# Altium PCB Digital Sensor Module.PcbDoc
Units mil, origin at the board's own origin, x right, y up, seen from the top; angles counter-clockwise.
Board outline 3750 x 900 mil, 2 copper layers (Top Layer, Bottom Layer); 62 components, 57 nets, 230 pads, 52 vias.
Unrouted connection lines stored in the file: 125.
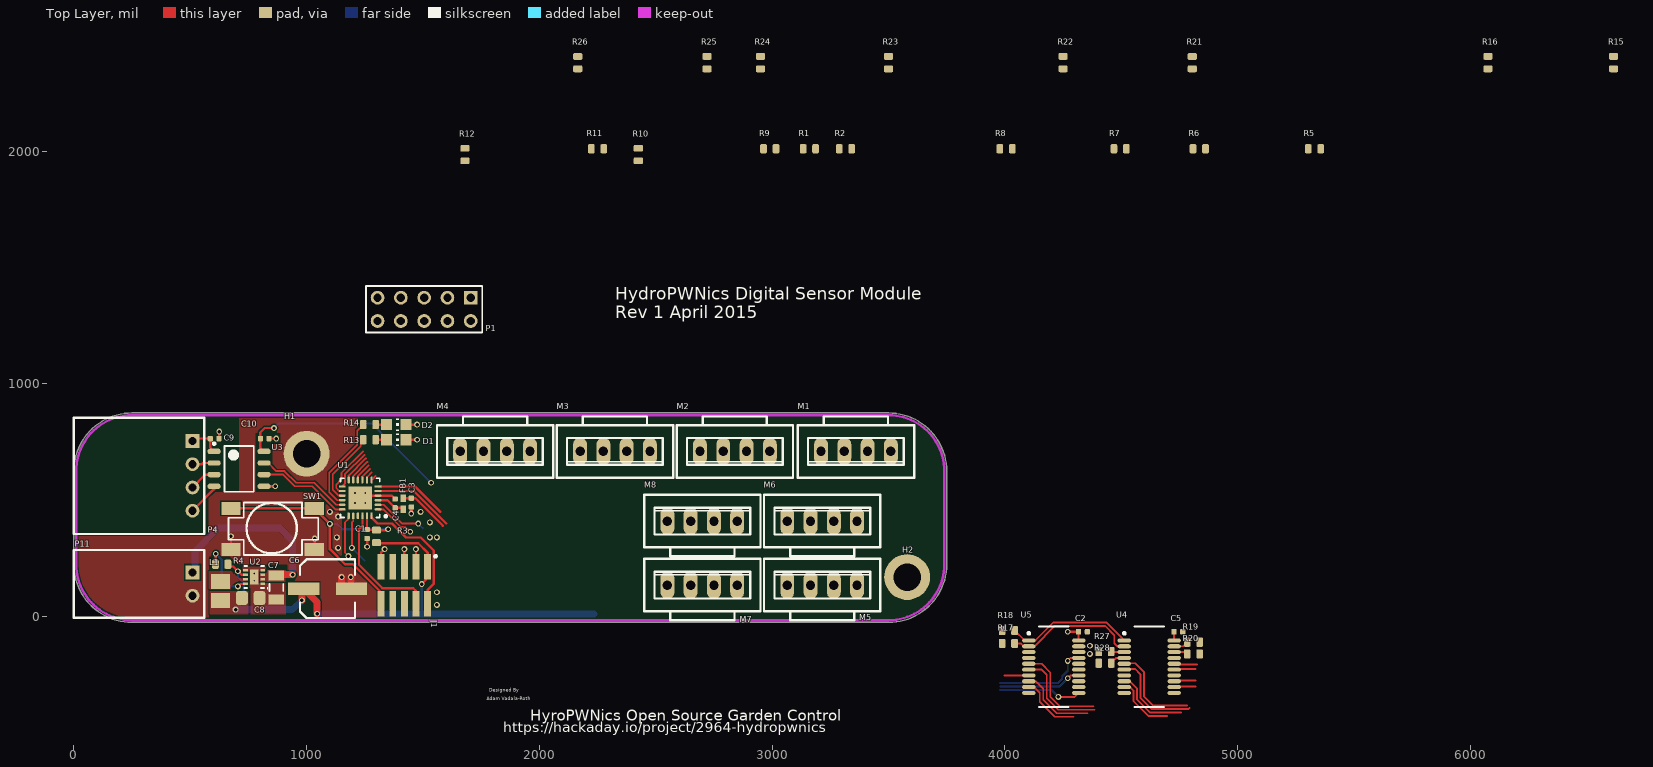
[diagram p0: Top Layer view]
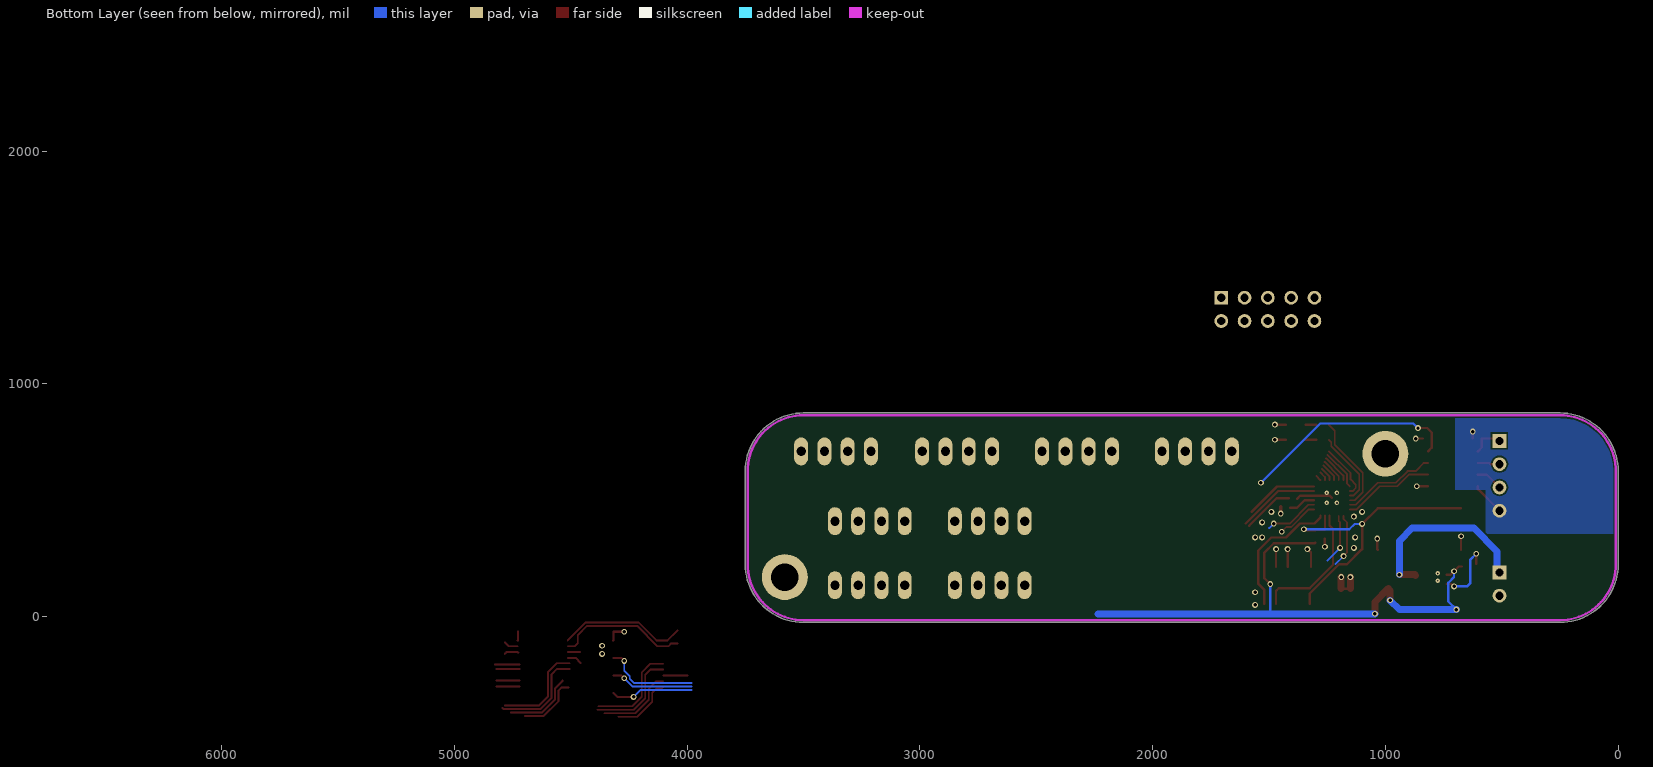
[diagram p1: Bottom Layer view, seen from below]

## Layer stack, top to bottom
Top Solder: solder mask 0.4, Solder Resist, Dk 3.5
Top Layer: signal copper 1.4
Dielectric 1: dielectric 12.6, FR-4, Dk 4.8
Bottom Layer: signal copper 1.4
Bottom Solder: solder mask 0.4, Solder Resist, Dk 3.5

## Board outline
0,225 0,625 cw(c250,625) 250,875 3500,875 cw(c3500,625) 3750,625 3750,225 cw(c3500,225) 3500,-25 250,-25 cw(c250,225)

## Design rules (kind name [scope] priority, off if disabled: settings)
Clearance [All] p1: gap=7
PlaneConnect [All] p1: planeconnectstyle=Direct reliefexpansion=20 reliefentries=4 reliefconductorwidth=10 reliefairgap=10
PolygonConnect [All] p1: connectstyle=Direct reliefconductorwidth=10 reliefentries=4 polygonreliefangle="90 Angle" airgapwidth=10
RoutingVias [All] p1: holewidth=28 width=50 viastyle="Through Hole" minholewidth=28 minwidth=50 maxholewidth=28 maxwidth=50
SolderMaskExpansion [All] p1: expansion=4
Width [All] p1: maxlimit=100 minlimit=7 preferedwidth=8
29 further rules are at their usual default settings.

## Components (designator, comment, footprint, x,y, rotation, side; value= is the part's Value field where it differs from the comment)
C1 "100nF" C0402 1260,355 r270 top
C2 "100nF" C0402 4335,-65 r0 top
C3 "100nF" C0402 1450,490 r270 top
C4 "100nF" C0402 1380,486.38 r90 top
C5 "100nF" C0402 4745,-65 r0 top
C6 "EEE-1VA101XP" EEE-1VA101XP 1090,120 r180 top
C7 "10uF 50V" C1206 870,125 r270 top
C8 "0603" C0805 760,80 r180 top
C9 "100nF" C0402 605,765 r0 top
C10 "100nF" C0402 820,765 r0 top
D1 "5988140107F" LED2012120 1385,760 r0 top
D2 "5988140107F" LED2012120 1385,825 r0 top
FB1 "BLM15HG601SN1D" BLM18PG121SN1D 1415,485 r270 top
H1 "M3 Hole" Hole-3mm#1 1025,720 r0 top
H2 "M3 Hole" Hole-3mm#2 3575,150 r0 top
J1 "FTSH-105-XX-X-DV" FTSH-105-XX-X-DV 1420,135 r0 top
L1 "VLS252012T-2R2M1R3" VLS252012T-2R2M1R3 630,110 r270 top
M1 "Molex 0705430003" 4POL254 3360,710 r180 top
M2 "Molex 0705430003" 4POL254 2840,710 r180 top
M3 "Molex 0705430003" 4POL254 2325,710 r180 top
M4 "Molex 0705430003" 4POL254 1810,710 r180 top
M5 "Molex 0705430003" 4POL254 3215,135 r0 top
M6 "Molex 0705430003" 4POL254 3215,410 r0 top
M7 "Molex 0705430003" 4POL254 2700,135 r0 top
M8 "Molex 0705430003" 4POL254 2700,410 r0 top
P1 "Header 5X2" HDR2X5 1705,1370 r180 top
P4 "Molex 0705530003" 0705530003 510,755 r270 top
P11 "Molex 0705530001" 0705530001 510,190 r270 top
R1 "4.7K" R0603 3160,2010 r0 top
R2 "4.7K" R0603 3315,2010 r0 top
R3 "1K" R0603 1300,345 r270 top
R4 "100K" R0603 635,225 r0 top
R5 "4.7K" R0603 5330,2010 r0 top
R6 "4.7K" R0603 4835,2010 r0 top
R7 "4.7K" R0603 4495,2010 r0 top
R8 "4.7K" R0603 4005,2010 r0 top
R9 "4.7K" R0603 2990,2010 r0 top
R10 "4.7K" R0603 2425,1985 r90 top
R11 "4.7K" R0603 2250,2010 r0 top
R12 "4.7K" R0603 1680,1985 r90 top
R13 "1K" R0603 1270,760 r0 top
R14 "1K" R0603 1270,825 r0 top
R15 "4.7K" R0603 6615,2380 r90 top
R16 "4.7K" R0603 6075,2380 r90 top
R17 "4.7K" R0603 4015,-115 r0 top
R18 "4.7K" R0603 4015,-60 r0 top
R19 "4.7K" R0603 4810,-110 r180 top
R20 "4.7K" R0603 4810,-160 r180 top
R21 "4.7K" R0603 4805,2380 r90 top
R22 "4.7K" R0603 4250,2380 r90 top
R23 "4.7K" R0603 3500,2380 r90 top
R24 "4.7K" R0603 2950,2380 r90 top
R25 "4.7K" R0603 2720,2380 r90 top
R26 "4.7K" R0603 2165,2380 r90 top
R27 "4.7K" R0603 4430,-150 r0 top
R28 "4.7K" R0603 4430,-200 r0 top
SW1 "TL3301AF160QG" TL3301AF160QG 675,465 r0 top
U1 "MKL05Z16VFK4 - VQFN24" 98ASA00474D 1230,510 r180 top
U2 "TPS62162DSG" DSG8-1600X900TP 775,170 r180 top
U3 "ADUM3210BRZ-RL7" ADUM3210BRZ-RL7 710,635 r0 top
U4 "PCA9518DWR" PCA9518DWR 4620,-215 r0 top
U5 "PCA9518DWR" PCA9518DWR 4210,-215 r0 top

## Footprints (in the part's own frame and the unit in brackets; to place one, negate y for a bottom-side part, rotate by r counter-clockwise, add the part's x,y. Pads: shape width x height; smd on the part's side, far side on the other; paste and mask are expansions set on the pad)
4POL254 [mil]
  oval 60x120 hole 40: 1(-150,0) 2(-50,0) 3(50,0) 4(150,0)
  silkscreen extent -250,-150 250,113, body extent -250,-150 250,113, height 454
98ASA00474D [mm] "QFN, 24-Leads, Body 3.98x3.98mm, Pitch 0.50mm, Thermal Pad 2.80x2.80mm, IPC Medium Density"
  oval 0.75x0.25 smd: 1(-1.95,1.25) 2(-1.95,0.75) 3(-1.95,0.25) 4(-1.95,-0.25) 5(-1.95,-0.75) 6(-1.95,-1.25) 13(1.95,-1.25) 14(1.95,-0.75) 15(1.95,-0.25) 16(1.95,0.25) 17(1.95,0.75) 18(1.95,1.25)
  oval 0.25x0.75 smd: 7(-1.25,-1.95) 8(-0.75,-1.95) 9(-0.25,-1.95) 10(0.25,-1.95) 11(0.75,-1.95) 12(1.25,-1.95) 19(1.25,1.95) 20(0.75,1.95) 21(0.25,1.95) 22(-0.25,1.95) 23(-0.75,1.95) 24(-1.25,1.95)
  rect 2.54x2.54 smd: 25(0,0)
  silkscreen extent -2.93,-2.15 2.15,2.15, body extent -2,-2 2,2, height 1
0705530001 [mm]
  rect 1.5x1.5 hole 0.9: 1(0,0)
  round 1.5 hole 0.9: 2(2.54,0)
  silkscreen extent -2.44,-12.95 4.95,1.27, body extent -2.41,-12.88 4.95,0.71, height 6.96
0705530003 [mm] "Molex 2.54mm 0705530003"
  rect 1.5x1.5 hole 0.9: 1(0,0)
  round 1.5 hole 0.9: 2(2.54,0) 3(5.08,0) 4(7.62,0)
  silkscreen extent -2.54,-12.95 10.16,1.27, body extent -2.54,-13.08 10.16,0.51, height 3.02
ADUM3210BRZ-RL7 [mm] "SOIC, 8-Leads, Body 4.90x3.90mm, Pitch 1.27mm, IPC Medium Density"
  oval 1.45x0.6 smd: 1(-2.725,1.905) 2(-2.725,0.635) 3(-2.725,-0.635) 4(-2.725,-1.905) 5(2.725,-1.905) 6(2.725,-0.635) 7(2.725,0.635) 8(2.725,1.905)
  silkscreen extent -2.85,-2.5 1.6,2.88, body extent -2,-2.5 2,2.5, height 1.75
BLM18PG121SN1D [mm] "Chip Inductor, 2-Leads, Body 1.0x0.5mm, IPC Medium Density"
  rect 0.8x0.6 smd: 1(-0.6,0) 2(0.6,0)
  body extent -0.52,-0.28 0.53,0.27, height 0.6
C0402 [mil]
  rrect40% 22x24 smd: 1(-18.7,0) 2(19,0)
  body extent -20,-10 20,10, height 20
C0805 [mil]
  rrect50% 52x60 smd: 1(-37.4,0) 2(38,0)
  body extent -40,-30 40,30, height 35
C1206 [mm]
  rect 1.1x1.7 smd: 1(-1.325,0) 2(1.325,0)
  silkscreen extent -0.4,-0.75 0.4,0.75, body extent -1.68,-0.87 1.67,0.88, height 1.6
DSG8-1600X900TP [mm] "SON, 8-Leads, Body 2x2mm, Pitch 0.5mm, Thermal Pad 1.6x0.9mm, TI Recommended"
  rect 0.5x0.28 smd paste-0.14 mask+0.07: 1(-0.95,0.75) 2(-0.95,0.25) 3(-0.95,-0.25) 4(-0.95,-0.75) 5(0.95,-0.75) 6(0.95,-0.25) 7(0.95,0.25) 8(0.95,0.75)
  rect 0.9x1.6 smd paste-0.45 mask+0.07: 9(0,0)
  silkscreen extent -1.5,-1.2 1.05,1.25, body extent -1.05,-1.05 1.05,1.05, height 0.8
EEE-1VA101XP [mm] "Panasonic VS D EEE-1VA101XP"
  rect 3.4x1.4 smd: 1(2.6,0) 2(-2.6,0)
  silkscreen extent -3,-3.2 3,3.2, body extent -3.5,-3.3 3.5,3.3, height 5.4
FTSH-105-XX-X-DV [mm] "1.27mm pitch, 10 pin, terminal strip; vertical, SMT"
  rect 0.75x2.8 smd mask+0: 1(2.54,2.03) 2(2.54,-2.03) 3(1.27,2.03) 4(1.27,-2.03) 5(0,2.03) 6(0,-2.03) 7(-1.27,2.03) 8(-1.27,-2.03) 9(-2.54,2.03) 10(-2.54,-2.03)
  silkscreen extent 3.28,3.03 3.52,3.27
HDR2X5 [mm] "Connector; Header; 5x2 Position"
  rect 1.5x1.5 hole 0.9: 1(0,0)
  round 1.5 hole 0.9: 2(0,2.54) 3(2.54,0) 4(2.54,2.54) 5(5.08,0) 6(5.08,2.54) 7(7.62,0) 8(7.62,2.54) 9(10.16,0) 10(10.16,2.54)
  silkscreen extent -1.27,-1.27 11.43,3.81
Hole-3mm#1 [mm]
  round 5 hole 3: 1(-0.635,-0.508)
Hole-3mm#2 [mm]
  round 5 hole 3: 1(0.127,0.508)
LED2012120 [mil]
  rect 48x48 smd: A(-41.34,0) C(42,0)
  silkscreen extent 0,-27 12,27, body extent -50,-25 50,25, height 28
PCA9518DWR [mm] "SOP, 20-Leads, Body 8.65x3.90mm, Pitch 0.64mm, Thermal Pad 5.22x3.10mm, IPC Medium Density"
  oval 1.45x0.45 smd: 1(-2.725,2.857) 2(-2.725,2.222) 3(-2.725,1.587) 4(-2.725,0.953) 5(-2.725,0.318) 6(-2.725,-0.318) 7(-2.725,-0.953) 8(-2.725,-1.587) 9(-2.725,-2.222) 10(-2.725,-2.857) 11(2.725,-2.857) 12(2.725,-2.222) 13(2.725,-1.587) 14(2.725,-0.953) 15(2.725,-0.318) 16(2.725,0.318) 17(2.725,0.953) 18(2.725,1.587) 19(2.725,2.222) 20(2.725,2.857)
  silkscreen extent -2.85,-4.4 1.6,4.4, body extent -2,-4.4 2,4.4, height 1.75
R0603 [mm]
  rrect40% 0.74x1 smd: 1(-0.68,0) 2(0.68,0)
  body extent -0.8,-0.4 0.8,0.4, height 0.8
TL3301AF160QG [mm] "TL3301AF160QG Tactile Switch"
  rect 2.1x1.4 smd: 1(0,0) 1(9.1,0) 2(0,-4.5) 2(9.1,-4.5)
  silkscreen extent -0.25,-5.08 9.53,0.64, body extent -0.43,-5.26 9.57,0.74, height 5.11
VLS252012T-2R2M1R3 [mm] "Precision Wire Wound Inductor, 2-Leads, Body 2.5x2.0mm, IPC Medium Density"
  rect 1.65x2.1 smd: 1(-1.025,0) 2(1.025,0)
  body extent -1.3,-1.05 1.3,1.05, height 1.2

## Part data
C1 C2 C3 C4 C5 C9 C10: library part GRM155R71C104KA88D, "CAP CER 0402 100nF 16V 10% X7R"
C6: "CAP ALUM 100UF 35V 20% SMD"
C7: library part CL31A106KBHNNNE, "CAP CER 10UF 50V 10% X5R 1206"
C8: library part CL21A226KQQNNNE, "CAP CER 22UF 6.3V 10% X5R 0805"
D1 D2: "LED 0805 Yellow"
H1 H2: library part Hole, "3mm Hole"
J1: library part "ARM Cortex JTAG-DEBUG Header"
M1 M2 M3 M4 M5 M6 M7 M8: library part "Molex 0705430003 Alt", "Molex 4 Pin Clip Connector"
P1: "Header, 5-Pin, Dual row"
P4: library part 0705530003, "Molex 0705530003 Right Angle 2.54mm Shrouded Header"
P11: library part 0705530001, "Molex 0705530002 Right Angle 2.54mm Shrouded Header"
R1 R2 R5 R6 R7 R8 R9 R10 R11 R12 R15 R16 R17 R18 R19 R20 R21 R22 R23 R24 R25 R26 R27 R28: library part ERJ3EKF4701V, "RES 0603 4.7K 100mW 1%"
R3 R13 R14: library part ERJ-3EKF1001V, "RES 0603 1K 100mW 1%"
R4: library part RC0603FR-07100KL, "RES 100K OHM 1/10W 1% 0603 SMD"
U1: library part "MKL05Z16VFK4 - 24 Pin VQFN", "ARM Cortex M0+"
U2: library part TPS62162SOP
U3: "DGTL ISO 2.5KV GEN PURP 8SOIC"
U4 U5: "IC EXPANDABLE 5CH I2C HUB 20SOIC"

## Via types
v1: diameter 25, hole 15, Top Layer to Bottom Layer, 46 vias
v2: diameter 19.68, hole 7.87, Top Layer to Bottom Layer, 6 vias

## Nets (pads, with @x,y where several pads share a name; then routed paths per layer and width w, separated by ;. In a path a pad name is that pad's centre, name@x,y a point inside that pad or via, vN(x,y) a via of type N, cw(c..) or ccw(c..) an arc to the next point about the centre after c; other vN are vias at no path point)
3.3VCC: C2.1 C3.1 C5.1 C6.1 C8.2 C10.1 FB1.1 J1.1 L1.2 M1.1 M2.1 M3.1 M4.1 M5.1 M6.1 M7.1 M8.1 P1.2 R1.1 R2.1 R3.2 R4.2 R5.1 R6.1 R7.1 R8.1 R9.1 R10.1 R11.1 R12.1 R15.1 R16.1 R17.1 R18.1 R19.1 R20.1 R21.1 R22.1 R23.1 R24.1 R25.1 R26.1 R27.1 R28.1 U2.6 U3.8 U4.20 U5.20 | length 3745.6
  Top Layer w10: R4.2@671.78,215 685,215 v1(705,195) 720.16,179.84 U2.6 ; U3.8 801.3,725.98 C10.1 801.3,791.3 820,810 v1(860,810) ; R3.2 1303.23,315 1480,315 1520,275 J1.1 1520,165 v1(1495,140) ; FB1.1 C3.1@1449.92,508.62 ; C3.1 1467.26,508.7 1585,390.96 ; v1(4270,-65) C2.1 4316.3,-101.52 U5.20 ; C5.1 4726.3,-101.52 U4.20
  Top Layer w30: v1(980,70) 980,112.36 C6.1 1045,62.64 v1(1045,12)
  Bottom Layer w10: v1(695,30) 730,65 730,145 705,170 v1(705,195) ; v1@857.5,807.5 v1(860,810) 880,830 1280,830 v1(1535,575) ; 1495,12 v1(1495,140)
  Bottom Layer w30: v1(695,30) 940,30 v1(980,70) ; v1(1045,12) 1495,12 2235,12
12VCC: C7.1 P11.1 U2.2 U2.3 | length 790.4
  Top Layer w30: C7.1 872.83,180 v1(940,180)
  Bottom Layer w30: P11.1@520,190 520,280 620,380 885,380 940,325 v1(940,180)
EN1: U1.20 U4.7 U5.7 | length 323.5
  Top Layer w8: v1(1195,295) 1195,405 1200.47,410.47 U1.20 ; 3997.5,-252.5 U5.7
  Bottom Layer w8: v1(1195,295) 1250,240
EN2: U1.19 U4.11 U5.11 | length 592.4
  Top Layer w8: v1(1180,260) 1165,275 1165,405 1180.79,420.79 U1.19 ; v1(4230,-345) 4299.78,-345 U5.11
  Bottom Layer w8: v1(1180,260) 1215,225 ; 3980,-315 4200,-315 v1(4230,-345)
EN3: U1.1 U4.14 U5.14 | length 534.9
  Top Layer w8: U1.1 1329.21,460.79 1405,385 1425,385 v1(1445,365) ; v1(4270,-265) 4282.5,-252.5 U5.14
  Bottom Layer w8: 3980,-300 4235,-300 v1(4270,-265)
EN4: U1.2 U4.17 U5.17 | length 648.2
  Top Layer w8: U1.2 1330.74,480.47 1411.21,400 v1(1480,400) ; v1(4270,-190) 4282.5,-177.5 U5.17
  Bottom Layer w8: v1(1480,400) 1500,380 ; 3980,-285 4228.79,-285 4246.5,-267.29 4246.5,-255.27 4270,-231.77 v1(4270,-190)
EXPSCL1: R18.2 U4.1 U5.1 | length 553.3
  Top Layer w8: R18.2 4084.28,-102.5 U5.1 4131.29,-102.5 4208.79,-25 4436.21,-25 4512.72,-101.5 U4.1
EXPSCL2: R17.2 U4.2 U5.2 | length 569.1
  Top Layer w8: R17.2 4067.44,-115 4079.95,-127.5 U5.2 4127.5,-127.5 4215,-40 4430,-40 4470,-80 4470,-115 4482.5,-127.5 U4.2
EXPSDA1: R20.2 U4.18 U5.18 | length 62.6
  Top Layer w8: U4.18@4724.78,-155 U4.18 4775.72,-152.5 R20.2
  other v1: 4365,-160
EXPSDA2: R19.2 U4.19 U5.19 | length 63.2
  Top Layer w8: U4.19 4765.73,-127.5 R19.2
  other v1: 4365,-125
GND: C1.2 C2.2 C3.2 C4.2 C5.2 C6.2 C7.2 C8.1 C10.2 D1.C D2.C H1.1 H2.1 J1.3 J1.5 J1.9 M1.4 M2.4 M3.4 M4.4 M5.4 M6.4 M7.4 M8.4 P1.1 P11.2 SW1.2 U1.4 U1.25 U2.1 U2.4 U2.5 U2.9 U3.5 U4.10 U5.10 | length 877.6
  Top Layer w10: SW1.2@675,287.83 v1(675,345) ; U3.5 v1(865,560) ; C10.2 v1(870,765) ; SW1.2@1033.27,287.83 1035,289.57 v1(1035,335) ; C6.2@1150,120 C6.2 ; U1.25 1239.84,519.84 U1.4 1365.54,519.84 C4.2 ; v1(1260,300) C1.2 ; J1.9 1320,275 v1(1335,290) ; J1.5 v1(1420,290) ; D1.C v1(1475,760) ; D2.C v1(1475,825) ; J1.3 v1(1470,290)
  Top Layer w15: v1(1450,443.01) C3.2
  Top Layer w30: C6.2@1150,120 v1(1150,170) ; C6.2@1190,120 v1(1190,170)
  other v1: 1560,50 1560,105 1135,295 1130,340 1530,340 1560,340 1530,405 1135,430 1100,450 1490,450
  other v2: 775,154.25 775,185.75 1208.35,488.35 1251.65,488.35 1208.35,531.65 1251.65,531.65
I2C_SCL: R1.2 U1.5 U5.4 | length 351
  Top Layer w10: U1.5 1460.47,539.53 1600,400
I2C_SDA: R2.2 U1.6 U5.3 | length 313.5
  Top Layer w10: U1.6 1465.79,559.21 1575,450
I3.3VCC: C9.1 P4.1 U3.1 | length 142.2
  Top Layer w10: P4.1 520,765 C9.1 586.3,726.42 U3.1
IGND: C9.2 P4.4 U3.4 | length 173.8
  Top Layer w10: P4.4 602.72,547.72 U3.4 ; C9.2 625,766 v1(625,795)
IUART0_RX: P4.3 U3.3 | length 115.5
  Top Layer w10: P4.3 565,610 U3.3
IUART0_TX: P4.2 U3.2 | length 94.8
  Top Layer w10: P4.2 550,655 555,660 U3.2
NetC4_1: C4.1 FB1.2 U1.3 | length 115.4
  Top Layer w10: U1.3 1347.52,500.16 C4.1 FB1.2@1408.7,467.68
NetD1_A: D1.A R13.2 | length 46.9
  Top Layer w10: R13.2 D1.A
NetD2_A: D2.A R14.2 | length 46.9
  Top Layer w10: R14.2 D2.A
NetL1_1: L1.1 U2.7
NetM1_2: M1.2 R5.2 U4.5 | length 414.4
  Top Layer w8: U4.5@4505,-200 4559.78,-200 4597.28,-237.5 4597.28,-342.5 4637.28,-382.5 4782.28,-382.5
NetM1_3: M1.3 R6.2 U4.6 | length 421.3
  Top Layer w8: U4.6@4505,-225 4559.78,-225 4582.28,-247.5 4582.28,-348.71 4631.07,-397.5 4788.5,-397.5 4793.5,-392.5
NetM2_2: M2.2 R7.2 U4.8 | length 307.2
  Top Layer w8: U4.8@4534.78,-275 4567.28,-307.5 4567.28,-354.93 4624.86,-412.5 4757.28,-412.5
NetM2_3: M2.3 R8.2 U4.9 | length 264.3
  Top Layer w8: U4.9@4510.14,-305.14 4540.14,-305.14 4552.28,-317.28 4552.28,-362.5 4617.28,-427.5 4697.28,-427.5
NetM3_2: M3.2 R9.2 U4.12 | length 100.2
  Top Layer w8: U4.12@4719.57,-300 4819.78,-300
NetM3_3: M3.3 R10.2 U4.13 | length 100.2
  Top Layer w8: U4.13@4719.57,-275 4819.78,-275
NetM4_2: M4.2 R11.2 U4.15 | length 100.2
  Top Layer w8: U4.15@4719.57,-225 4819.78,-225
NetM4_3: M4.3 R12.2 U4.16 | length 105.2
  Top Layer w8: U4.16@4720,-205 4825.22,-205
NetM5_2: M5.2 R15.2 U5.5 | length 414.4
  Top Layer w8: U5.5 4157.5,-202.5 4195,-240 4195,-345 4235,-385 4380,-385
NetM5_3: M5.3 R16.2 U5.6 | length 414.2
  Top Layer w8: U5.6 4157.5,-227.5 4180,-250 4180,-351.21 4228.79,-400 4386.21,-400
NetM6_2: M6.2 R21.2 U5.8 | length 337
  Top Layer w8: U5.8 4132.5,-277.5 4165,-310 4165,-357.43 4222.57,-415 4355,-415
NetM6_3: M6.3 R22.2 U5.9 | length 267.3
  Top Layer w8: U5.9 4107.86,-307.64 4130.63,-307.64 4150,-327.01 4150,-365 4215,-430 4295,-430
NetM7_2: M7.2 R23.2 U5.12
NetM7_3: M7.3 R24.2 U5.13
NetM8_2: M8.2 R25.2 U5.15
NetM8_3: M8.3 R26.2 U5.16
NetR4_1: R4.1 U2.8 | length 291.7
  Top Layer w10: R4.1@610,226.77 v1(610,270) ; v1(705,130) 715.47,140.47 U2.8
  Bottom Layer w10: v1(610,270) 635,245 635,145 650,130 v1(705,130)
NetR27_2: R27.2 U4.3 | length 53.4
  Top Layer w8: R27.2@4459.28,-152.5 U4.3
NetR28_2: R28.2 U4.4 | length 65.3
  Top Layer w8: R28.2 4479.27,-177.5 U4.4
PTB1: P1.10 U1.13 | length 175.5
  Top Layer w8: U1.13 1164.87,570.85 1164.87,610.85 1249.02,695
PTB2: P1.9 U1.14 | length 236.3
  Top Layer w8: U1.14 1140.56,539.53 1127.46,552.62 1127.46,567.46 1149.87,589.87 1149.87,617.06 1242.8,710
PTB10: P1.6 U1.9 | length 61.6
  Top Layer w8: U1.9 1239.84,600.97 1273.34,634.47
PTB11: P1.5 U1.10 | length 82.2
  Top Layer w8: U1.10 1220.16,602.5 1267.13,649.47
RESET: C1.1 J1.10 R3.1 SW1.1 U1.23 | length 1312.6
  Top Layer w10: SW1.1@675,465 1033.27,465 v1(1100,398.27) 1100,290 1165,225 1198.82,225 1325,98.82 J1.10@1325,55.08 ; C1.1@1259.53,381.29 U1.23 ; C1.1 1298.07,373.7 R3.1 1346.77,371.77 v1(1350,375)
  Bottom Layer w10: v1(1100,398.27) 1131.73,398.27 1155,375 v1(1350,375)
RX_LED: R14.1 U1.16 | length 420.7
  Top Layer w8: U1.16 1132.06,500.16 1097.46,534.75 1097.46,617.46 1217.66,737.66 1217.66,799.44 R14.1
SPI0_MISO: P1.3 U1.8 | length 41
  Top Layer w8: U1.8 1259.53,599.44 1279.55,619.47
SPI0_MOSI: P1.8 U1.11 | length 102.7
  Top Layer w8: U1.11 1200.47,604.03 1260.92,664.47
SPI0_SCK: P1.7 U1.12 | length 123.3
  Top Layer w8: U1.12 1180.79,605.56 1254.7,679.47
SPI0_SS: P1.4 U1.7 | length 25
  Top Layer w8: U1.7 1296.91,604.47
TCK/SWDCLK: J1.4 U1.22 | length 563.2
  Top Layer w10: U1.22 1239.84,390.94 1225,376.09 1225,222.86 1325.66,122.2 1457.8,122.2 1470,110 J1.4
TDI: J1.8
TDO/SWO: J1.6
TMS/SWDIO: J1.2 U1.24 | length 573.3
  Top Layer w10: U1.24 1279.21,425.79 1305,400 1367.37,400 1427.37,340 1490,340 1546.76,283.24 1546.76,141.76 1520,115 J1.2
TX_LED: R13.1 U1.15 | length 320.4
  Top Layer w8: U1.15 1137.61,519.84 1112.46,544.99 1112.46,611.25 1232.66,731.45 1232.66,749.44 R13.1
UART0_RX: U1.18 U3.6 | length 397.8
  Top Layer w8: U3.6 898.79,610 948.79,560 1024.14,560 1123.35,460.79 U1.18
UART0_TX: U1.17 U3.7 | length 410.3
  Top Layer w8: U3.7@835,660 870,625 905,625 955,575 1033.18,575 1127.71,480.47 U1.17
  Top Layer w10: U3.7 U3.7@835,660
pads on no net: J1.7 U1.21

## Polygon pours and split planes (outlines as drawn)
GND on Top Layer "Bottom Layer-No Net" (solid, remove dead copper, pour order 26): 1088.18,520 1097.46,529.29 1097.46,534.75 1097.46,617.46 1217.66,737.66 1220,740 1220,865 710,865 710,500 780,500 780,790 880,790 890,790 890,740 855,740 855,665 855,645 852.5,642.5 885,610 898.79,610 925,583.79 948.79,560 1015,560 1024.14,560 1065,519.14 1065.86,520
GND on Top Layer "Bottom Layer-No Net" (solid, remove dead copper, pour order 24): 0,345 315,345 580,345 580,535 1049.14,535 1154.57,429.57 1150,425 1150,240 1165,225 1190,225 1198.82,225 1325,98.82 1320,93.82 1320,-15 925,-15 920,-10 920,145 920,220 915,225 810,225 705,225 670,260 580,260 580,-15 0,-15
3.3VCC on Top Layer "Bottom Layer-No Net" (solid, remove dead copper, pour order 6): 750,110 750,10 585,10 585,110
12VCC on Top Layer "Bottom Layer-No Net" (solid, remove dead copper, pour order 2): 910,150 800,150 800,190 825,190 830,190 830,200 910,200
GND on Top Layer "Bottom Layer-No Net" (solid, remove dead copper, pour order 4): 910,10 910,143 792,143 792,195 825,195 825,215 725,215 725,194 755,194 755,185 755,125 760,125 760,10
NetL1_1 on Top Layer "Bottom Layer-No Net" (solid, remove dead copper, pour order 10): 747,165 717.07,165 711.53,167.29 684.93,185.07 680,190 680,195 580,195 580,115 675,115 675,130 691.46,146.46 712.07,155 747,155
IGND on Bottom Layer "Bottom Layer-No Net" (solid, remove dead copper, pour order 14): 10,860 10,355 570,355 570,545 700,545 700,640 700,860

## Keep-outs
Keep-Out Layer:
  lines w10: 10,225 ccw(c250,225) 250,-15 3310,-15 3500,-15 ccw(c3500,225) 3740,225 3740,625 ccw(c3500,625) 3500,865 665,865 285,865 250,865 ccw(c250,625) 10,625 10,225

## Silkscreen, mask and mechanical layers (free items; w line width, h text height)
Top Overlay:
  text "HydroPWNics Digital Sensor Module" at 2325,1345 h90
  text "Rev 1 April 2015" at 2325,1265 h90
  text "Designed By" at 1785,-330 h25
  text "Adam Vadala-Roth" at 1775,-365 h25
  text "HyroPWNics Open Source Garden Control" at 1960,-465 h80
  text "https://hackaday.io/project/2964-hydropwnics" at 1844.62,-512.81 h75
Mechanical 15:
  the board outline again, w10